# Altium PCB LED.PcbDoc
Units mm, origin at the board's own origin, x right, y up, seen from the top; angles counter-clockwise.
Board outline 66.17 x 37.72 mm, 2 copper layers (Top Layer, Bottom Layer); 48 components, 28 nets, 192 pads, 77 vias.
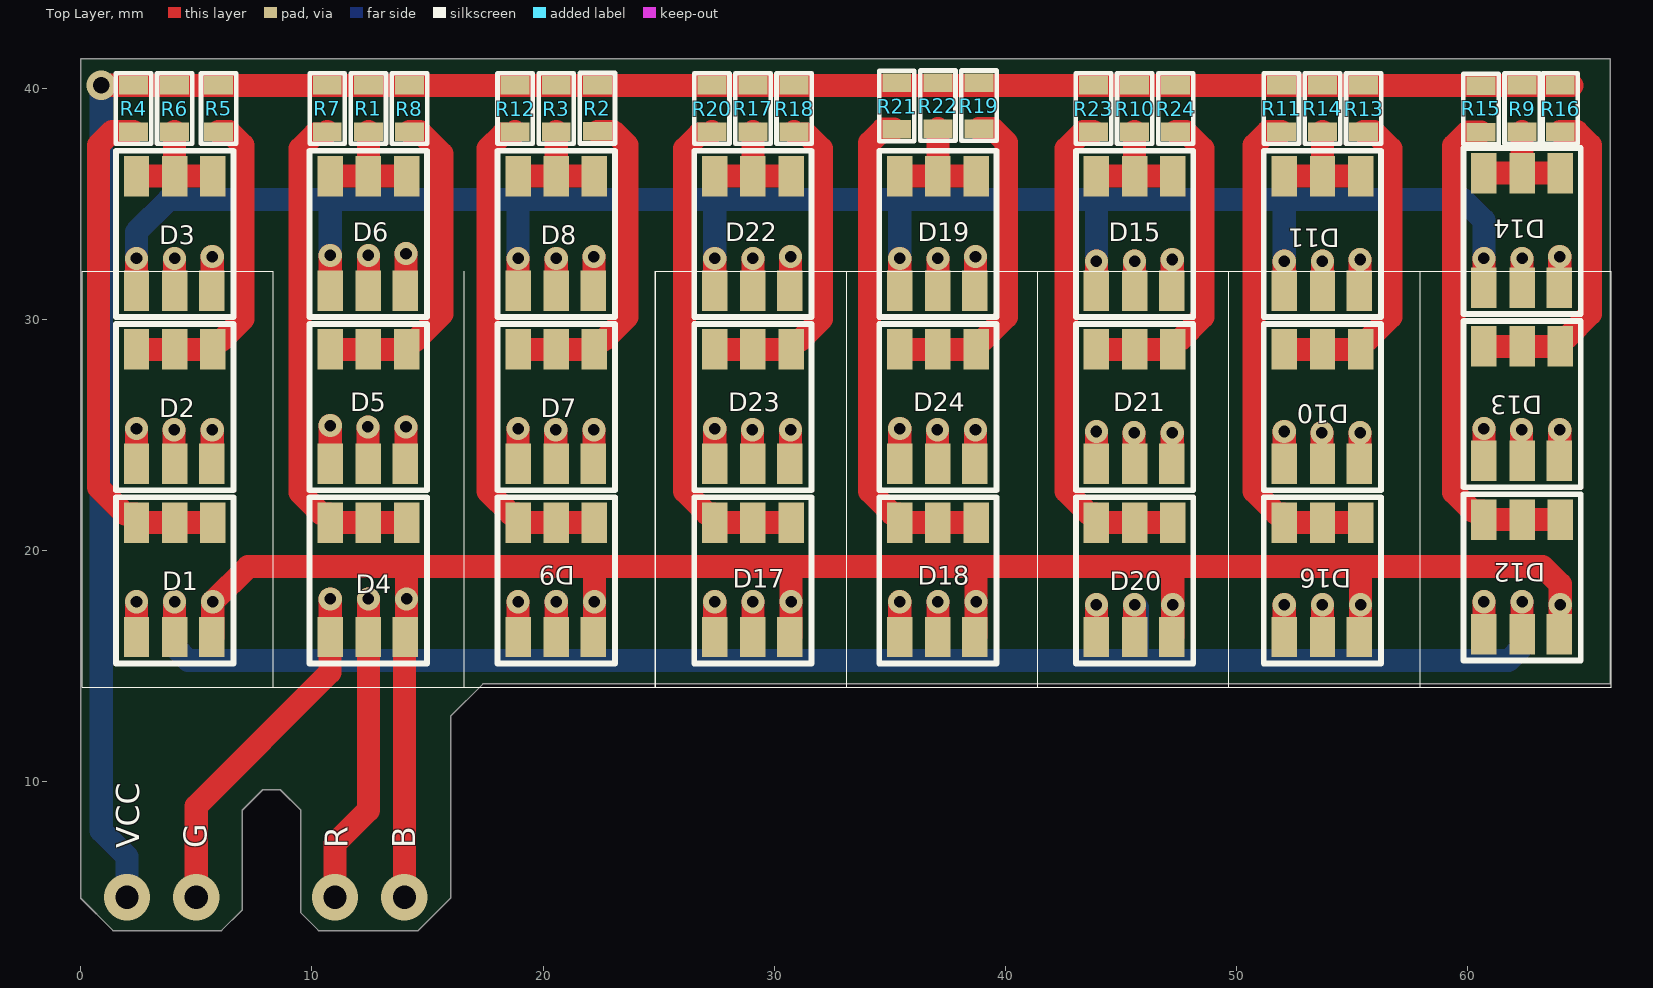
[diagram p0: Top Layer view]
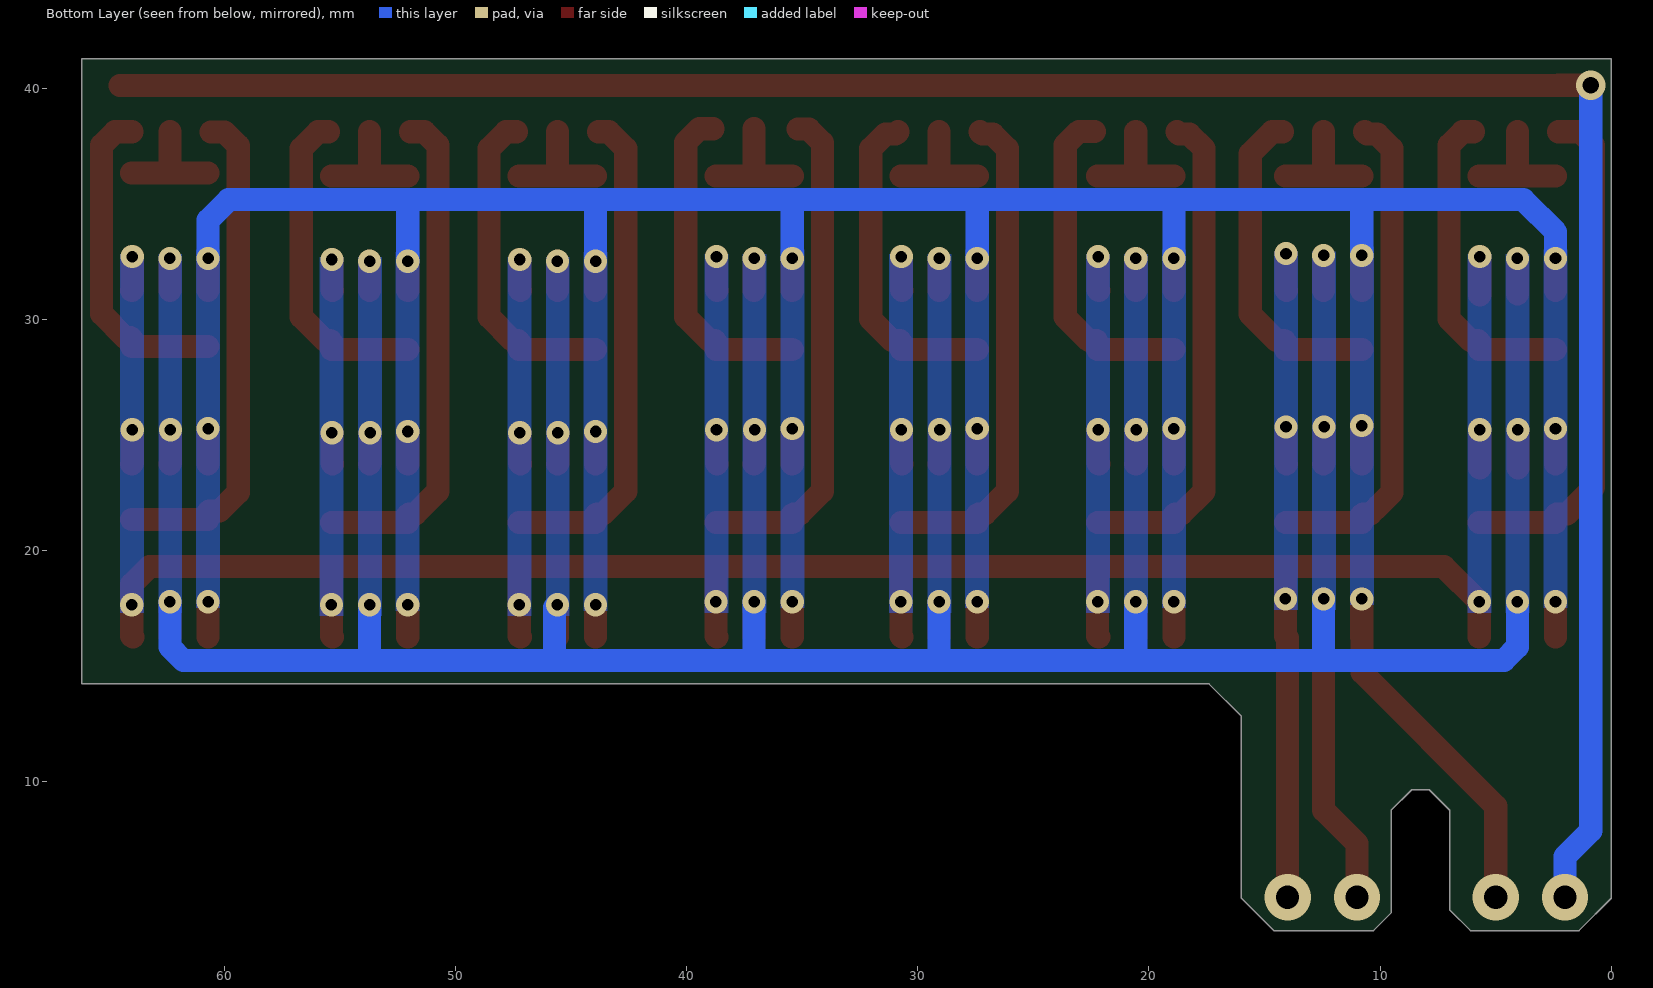
[diagram p1: Bottom Layer view, seen from below]
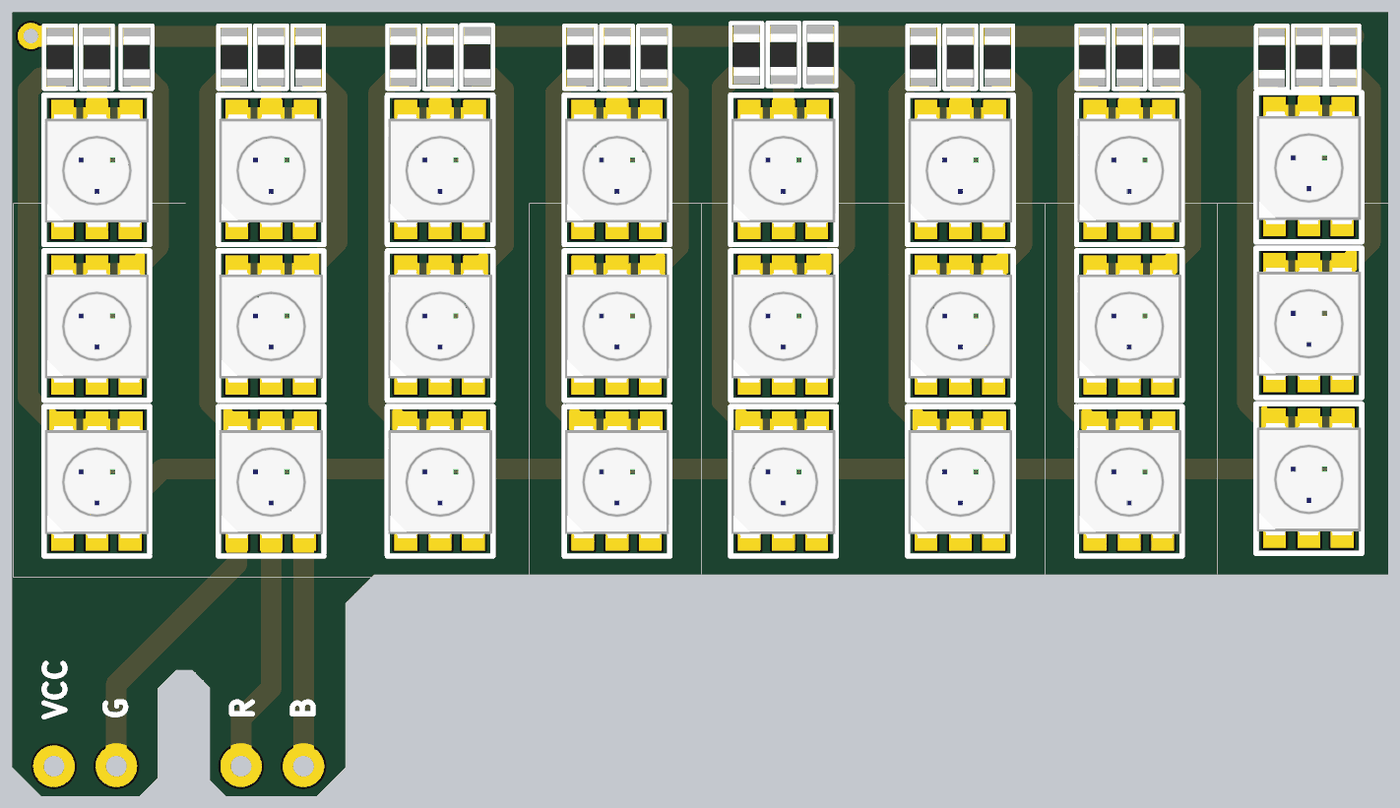
[diagram p2: 3D render of the assembled board from above, using the file's embedded part models]

## Layer stack, top to bottom
Top Solder: solder mask 0.0102, Solder Resist, Dk 3.5
Top Layer: signal copper 0.035
Dielectric 1: dielectric 0.32, FR-4, Dk 4.8
Bottom Layer: signal copper 0.035
Bottom Solder: solder mask 0.0102, Solder Resist, Dk 3.5

## Board outline
1.397,3.556 6.096,3.556 6.985,4.445 6.985,8.763 7.874,9.652 8.636,9.652 9.525,8.763 9.525,4.318 10.287,3.556 14.605,3.556 16.002,4.953 16.002,12.827 17.399,14.224 66.167,14.224 66.167,41.275 0,41.275 0,4.953

## Design rules (kind name [scope] priority, off if disabled: settings)
Clearance [All] p1: gap=0.254 ignorepadtopadclearanceinfootprint=FALSE
PolygonConnect [All] p1: connectstyle=Relief reliefconductorwidth=0.254 reliefentries=4 polygonreliefangle="90 Angle" airgapwidth=0.254
RoutingVias [All] p1: holewidth=0.711 width=1.27 viastyle="Through Hole" minholewidth=0.711 minwidth=1.27 maxholewidth=0.711 maxwidth=1.27
SolderMaskExpansion [All] p1: expansion=0.102 istentingtop=FALSE
Width [All] p1: maxlimit=5 minlimit=0.254 preferedwidth=0.254
30 further rules are at their usual default settings.

## Components (designator, comment, footprint, x,y, rotation, side; value= is the part's Value field where it differs from the comment)
D1 "LED_RGB" RGB_LED_5x5 4.064,18.669 r270 top
D2 "LED_RGB" RGB_LED_5x5 4.064,26.162 r270 top
D3 "LED_RGB" RGB_LED_5x5 4.064,33.655 r270 top
D4 "LED_RGB" RGB_LED_5x5 12.446,18.669 r270 top
D5 "LED_RGB" RGB_LED_5x5 12.446,26.162 r270 top
D6 "LED_RGB" RGB_LED_5x5 12.446,33.655 r270 top
D7 "LED_RGB" RGB_LED_5x5 20.574,26.162 r270 top
D8 "LED_RGB" RGB_LED_5x5 20.574,33.655 r270 top
D9 "LED_RGB" RGB_LED_5x5 20.574,18.669 r270 top
D10 "LED_RGB" RGB_LED_5x5 53.721,26.162 r270 top
D11 "LED_RGB" RGB_LED_5x5 53.721,33.655 r270 top
D12 "LED_RGB" RGB_LED_5x5 62.357,18.796 r270 top
D13 "LED_RGB" RGB_LED_5x5 62.357,26.289 r270 top
D14 "LED_RGB" RGB_LED_5x5 62.357,33.782 r270 top
D15 "LED_RGB" RGB_LED_5x5 45.593,33.655 r270 top
D16 "LED_RGB" RGB_LED_5x5 53.721,18.669 r270 top
D17 "LED_RGB" RGB_LED_5x5 29.083,18.669 r270 top
D18 "LED_RGB" RGB_LED_5x5 37.084,18.669 r270 top
D19 "LED_RGB" RGB_LED_5x5 37.084,33.655 r270 top
D20 "LED_RGB" RGB_LED_5x5 45.593,18.669 r270 top
D21 "LED_RGB" RGB_LED_5x5 45.593,26.162 r270 top
D22 "LED_RGB" RGB_LED_5x5 29.083,33.655 r270 top
D23 "LED_RGB" RGB_LED_5x5 29.083,26.162 r270 top
D24 "LED_RGB" RGB_LED_5x5 37.084,26.162 r270 top
R1 "220" RES-0805 12.446,39.116 r90 top
R2 "220" RES-0805 22.352,39.132 r90 top
R3 "220" RES-0805 20.574,39.116 r90 top
R4 "220" RES-0805 2.286,39.116 r90 top
R5 "220" RES-0805 5.969,39.116 r90 top
R6 "220" RES-0805 4.064,39.116 r90 top
R7 "220" RES-0805 10.668,39.116 r90 top
R8 "220" RES-0805 14.224,39.116 r90 top
R9 "220" RES-0805 62.357,39.116 r90 top
R10 "220" RES-0805 45.593,39.116 r90 top
R11 "220" RES-0805 51.943,39.116 r90 top
R12 "220" RES-0805 18.796,39.116 r90 top
R13 "220" RES-0805 55.499,39.116 r90 top
R14 "220" RES-0805 53.721,39.116 r90 top
R15 "220" RES-0805 60.579,39.1 r90 top
R16 "220" RES-0805 64.008,39.116 r90 top
R17 "220" RES-0805 29.083,39.116 r90 top
R18 "220" RES-0805 30.861,39.116 r90 top
R19 "220" RES-0805 38.862,39.243 r90 top
R20 "220" RES-0805 27.305,39.116 r90 top
R21 "220" RES-0805 35.306,39.227 r90 top
R22 "220" RES-0805 37.084,39.243 r90 top
R23 "220" RES-0805 43.815,39.116 r90 top
R24 "220" RES-0805 47.371,39.116 r90 top

## Footprints (in the part's own frame and the unit in brackets; to place one, negate y for a bottom-side part, rotate by r counter-clockwise, add the part's x,y. Pads: shape width x height; smd on the part's side, far side on the other; paste and mask are expansions set on the pad)
RES-0805 [mm]
  rect 0.8x1.25 smd mask+0.015: 1(-1,0) 2(1,0)
  silkscreen extent -1.52,-0.76 1.52,0.76, body extent -1,-0.62 1,0.63, height 0.6
RGB_LED_5x5 [mm]
  rect 1.75x1.1 / inner rect 1.524x1.524 / far side rect 0x0 all layers, no hole: 1(-2.54,1.651) 2(2.413,1.6) 3(-2.54,0) 4(2.413,0) 5(-2.54,-1.651) 6(2.413,-1.651)
  silkscreen extent -3.64,-2.54 3.56,2.54, body extent -2.7,-2.5 2.7,2.5, height 2

## Part data
R1 R2 R3 R4 R5 R6 R7 R8 R9 R10 R11 R12 R13 R14 R15 R16 R17 R18 R19 R20 R21 R22 R23 R24: library part RES-CONST

## Via types
v1: diameter 1, hole 0.5, Top Layer to Bottom Layer, 72 vias
v2: diameter 2, hole 1, Top Layer to Bottom Layer, 4 vias
v3: diameter 1.27, hole 0.711, Top Layer to Bottom Layer, 1 vias

## Nets (pads, with @x,y where several pads share a name; then routed paths per layer and width w, separated by ;. In a path a pad name is that pad's centre, name@x,y a point inside that pad or via, vN(x,y) a via of type N, cw(c..) or ccw(c..) an arc to the next point about the centre after c; other vN are vias at no path point)
NetD1_1: D1.1 D1.3 D1.5 R4.1 | length 22.3
  Top Layer w1: R4.1 1.348,38.116 0.762,37.53 0.762,22.733 1.911,21.584 2.363,21.584 2.413,21.534 D1.5 D1.3 D1.1
NetD1_2: D1.2 D2.2 D3.2 D4.2 D5.2 D6.2 D7.2 D8.2 D9.2 D10.2 D11.2 D12.2 D13.2 D14.2 D15.2 D16.2 D17.2 D18.2 D19.2 D20.2 D21.2 D22.2 D23.2 D24.2 | length 116.9
  Top Layer w1: D2.2@5.691,23.571 v1(5.691,25.222) ; D3.2@5.691,31.064 v1(5.691,32.715) ; D1.2@5.714,16.256 v1(5.715,17.78) v1(5.715,17.78) 7.239,19.304 14.097,19.304 ; v2@14.008,4.953 14.008,16.218 D4.2 14.096,16.306 v1(14.097,17.907) v1(14.097,17.907) 14.097,19.304 ; D5.2 14.073,23.776 v1(14.073,25.349) ; D6.2 14.073,31.269 v1(14.073,32.842) ; D9.2 22.224,16.306 v1(22.225,17.78) v1(22.225,17.78) 22.225,19.177 22.098,19.304 ; D7.2 22.201,23.776 v1(22.201,25.222) ; D8.2 22.201,31.269 v1(22.201,32.715) ; D17.2 30.733,16.306 v1(30.734,17.78) v1(30.734,17.78) 30.734,19.177 30.861,19.304 ; D23.2 30.71,23.776 v1(30.71,25.222) ; D22.2 30.71,31.269 v1(30.71,32.715) ; D18.2 38.734,16.306 v1(38.735,17.78) v1(38.735,17.78) 38.735,19.177 38.862,19.304 ; D24.2 38.711,23.776 v1(38.711,25.222) ; D19.2 38.711,31.269 v1(38.711,32.715) ; D20.2 47.243,16.306 v1(47.244,17.653) v1(47.244,17.653) 47.244,19.177 47.371,19.304 ; D21.2 47.22,23.776 v1(47.22,25.095) ; D15.2 47.22,31.269 v1(47.22,32.588) ; D16.2 55.371,16.306 v1(55.372,17.653) v1(55.372,17.653) 55.372,19.241 55.308,19.304 ; D10.2 55.348,23.776 v1(55.348,25.095) ; D11.2 55.348,31.269 v1(55.348,32.588) ; D12.2@63.957,16.256 64.007,16.306 v1(64.008,17.653) v1(64.008,17.653) 64.008,18.542 63.246,19.304 55.308,19.304 ; v1(63.984,25.222) 63.984,23.773 D13.2@64.008,23.749 ; v1(63.984,32.715) 63.984,31.266 D14.2@64.008,31.242 ; 14.097,19.304 22.098,19.304 ; 22.098,19.304 30.861,19.304 ; 30.861,19.304 38.862,19.304 ; 38.862,19.304 47.371,19.304 ; 47.371,19.304 55.308,19.304
  other v2: 14,5
NetD1_4: D1.4 D2.4 D3.4 D4.4 D5.4 D6.4 D7.4 D8.4 D9.4 D10.4 D11.4 D12.4 D13.4 D14.4 D15.4 D16.4 D17.4 D18.4 D19.4 D20.4 D21.4 D22.4 D23.4 D24.4 | length 125
  Top Layer w1: D2.4@4.04,23.571 v1(4.04,25.222) ; D1.4 v1(4.064,17.78) ; D3.4@4.064,31.088 D3.4 v1(4.064,32.639) ; v2(11,5) 11,7.317 12.446,8.763 D4.4 v1(12.446,17.907) ; v1(12.422,25.349) 12.422,23.773 D5.4 ; D6.4 v1(12.446,32.766) ; v1(20.55,25.222) 20.55,23.773 D7.4 ; D9.4 v1(20.574,17.78) ; D8.4 v1(20.574,32.639) ; v1(29.059,25.222) 29.059,23.773 D23.4 ; D17.4 v1(29.083,17.78) ; D22.4 v1(29.083,32.639) ; v1(37.06,25.222) 37.06,23.773 D24.4 ; D18.4 v1(37.084,17.78) ; D19.4 v1(37.084,32.639) ; v1(45.569,25.095) 45.569,23.773 D21.4 ; D20.4 v1(45.593,17.653) ; D15.4 v1(45.593,32.512) ; v1(53.697,25.095) 53.697,23.773 D10.4 ; D16.4 v1(53.721,17.653) ; D11.4 v1(53.721,32.512) ; v1(62.333,25.222) 62.333,23.773 D13.4@62.357,23.749 ; D12.4@62.357,16.256 D12.4 v1(62.357,17.78) ; D14.4@62.357,31.242 D14.4 v1(62.357,32.639)
  Bottom Layer w1: v1(4.064,17.78) 4.064,15.826 4.65,15.24 12.446,15.24 ; v1(12.446,17.907) 12.446,15.24 ; v1(20.574,17.78) 20.574,15.494 20.32,15.24 ; v1(29.083,17.78) 29.083,15.24 ; v1(37.084,17.78) 37.084,15.367 36.957,15.24 ; v1(45.593,17.653) 45.72,17.526 45.72,15.24 ; v1(53.721,17.653) 53.721,15.24 ; v1(62.357,17.78) 62.357,15.826 61.771,15.24 53.721,15.24 ; 12.446,15.24 20.32,15.24 ; 20.32,15.24 29.083,15.24 ; 29.083,15.24 36.957,15.24 ; 36.957,15.24 45.72,15.24 ; 45.72,15.24 53.721,15.24
NetD1_6: D1.6 D2.6 D3.6 D4.6 D5.6 D6.6 D7.6 D8.6 D9.6 D10.6 D11.6 D12.6 D13.6 D14.6 D15.6 D16.6 D17.6 D18.6 D19.6 D20.6 D21.6 D22.6 D23.6 D24.6 | length 126.4
  Top Layer w1: D1.6 v1(2.413,17.78) ; D2.6 v1(2.413,25.273) ; D3.6 v1(2.413,32.639) ; v2(5,5) 5,8.937 10.784,14.721 10.784,16.245 D4.6 v1(10.795,17.907) ; D5.6 v1(10.795,25.4) ; D6.6 v1(10.795,32.766) ; D9.6 v1(18.923,17.78) ; D7.6 v1(18.923,25.273) ; D8.6 v1(18.923,32.639) ; D17.6 v1(27.432,17.78) ; D23.6 v1(27.432,25.273) ; D22.6 v1(27.432,32.639) ; D18.6 v1(35.433,17.78) ; D24.6 v1(35.433,25.273) ; D19.6 v1(35.433,32.639) ; D20.6 v1(43.942,17.653) ; D21.6 v1(43.942,25.146) ; D15.6 v1(43.942,32.512) ; D16.6 v1(52.07,17.653) ; D10.6 v1(52.07,25.146) ; D11.6 v1(52.07,32.512) ; D12.6@60.706,16.256 D12.6 v1(60.706,17.78) ; D13.6@60.706,23.749 D13.6 v1(60.706,25.273) ; D14.6@60.706,31.242 D14.6 v1(60.706,32.639)
  Bottom Layer w1: v1(2.413,32.639) 2.413,33.782 3.81,35.179 10.795,35.179 ; v1(10.795,32.766) 10.795,35.179 ; v1(18.923,32.639) 18.923,35.052 19.05,35.179 ; v1(27.432,32.639) 27.432,35.052 27.305,35.179 ; v1(35.433,32.639) 35.433,35.052 35.56,35.179 ; v1(43.942,32.512) 43.942,35.179 ; v1(52.07,32.512) 52.07,35.052 51.943,35.179 ; v1(60.706,32.639) 60.706,34.29 59.817,35.179 51.943,35.179 ; 10.795,35.179 19.05,35.179 ; 19.05,35.179 27.305,35.179 ; 27.305,35.179 35.56,35.179 ; 35.56,35.179 43.942,35.179 ; 43.942,35.179 51.943,35.179
NetD2_1: D2.1 D2.3 D2.5 R5.1 | length 14.2
  Top Layer w1: D2.5 D2.3 D2.1 5.715,29.027 5.765,29.077 6.09,29.077 7.019,30.006 7.019,37.53 6.433,38.116 R5.1
NetD3_1: D3.1 D3.3 D3.5 R6.1 | length 5.2
  Top Layer w1: D3.5 D3.3 ; R6.1 D3.3 ; D3.1 D3.3
NetD4_1: D4.1 D4.3 D4.5 R7.1 | length 21.7
  Top Layer w1: R7.1 10.568,38.016 10.125,38.016 9.491,37.382 9.491,22.507 10.077,21.922 10.082,21.922 10.42,21.584 10.745,21.584 10.795,21.534 D4.5 D4.3 D4.1
NetD5_1: D5.1 D5.3 D5.5 R8.1 | length 14.4
  Top Layer w1: D5.5 D5.3 D5.1 14.097,29.027 14.147,29.077 14.472,29.077 15.621,30.226 15.621,37.162 14.667,38.116 R8.1
NetD6_1: D6.1 D6.3 D6.5 R1.1 | length 5.2
  Top Layer w1: D6.5 D6.3 ; R1.1 D6.3 ; D6.1 D6.3
NetD7_1: D7.1 D7.3 D7.5 R2.1 | length 14
  Top Layer w1: D7.5 D7.3 D7.1 ; D7.1@22.275,29.077 22.6,29.077 23.622,30.099 23.622,37.546 23.036,38.132 R2.1
NetD8_1: D8.1 D8.3 D8.5 R3.1 | length 5.2
  Top Layer w1: D8.5 D8.3 ; R3.1 D8.3 ; D8.1 D8.3
NetD9_1: D9.1 D9.3 D9.5 R12.1 | length 21.7
  Top Layer w1: R12.1 18.696,38.016 18.253,38.016 17.619,37.382 17.619,22.562 18.597,21.584 18.873,21.584 18.923,21.534 D9.5 D9.3 D9.1
NetD10_1: D10.1 D10.3 D10.5 R13.1 | length 14.1
  Top Layer w1: D10.5 D10.3 D10.1 55.372,29.027 55.422,29.077 55.647,29.077 56.676,30.106 56.676,37.382 55.942,38.116 R13.1
NetD11_1: D11.1 D11.3 D11.5 R14.1 | length 5.2
  Top Layer w1: D11.5 D11.3 ; R14.1 D11.3 ; D11.1 D11.3
NetD12_1: D12.1 D12.3 D12.5 R15.1 | length 21.7
  Top Layer w1: R15.1 59.993,38.1 59.402,37.509 59.402,22.513 60.204,21.711 60.656,21.711 60.706,21.661 D12.5 D12.3 D12.1
NetD13_1: D13.1 D13.3 D13.5 R16.1 | length 14.2
  Top Layer w1: D13.5 D13.3 D13.1 64.008,29.154 64.058,29.204 64.283,29.204 65.312,30.233 65.312,37.53 64.726,38.116 R16.1
NetD14_1: D14.1 D14.3 D14.5 R9.1 | length 5.1
  Top Layer w1: D14.5 D14.3 ; R9.1 D14.3 ; D14.1 D14.3
NetD15_1: D15.1 D15.3 D15.5 R10.1 | length 5.2
  Top Layer w1: D15.5 D15.3 ; R10.1 D15.3 ; D15.1 D15.3
NetD16_1: D16.1 D16.3 D16.5 R11.1 | length 21.7
  Top Layer w1: R11.1 51.352,38.116 50.766,37.53 50.766,22.562 51.744,21.584 52.02,21.584 52.07,21.534 D16.5 D16.3 D16.1
NetD17_1: D17.1 D17.3 D17.5 R20.1 | length 21.7
  Top Layer w1: R20.1 27.205,38.016 26.762,38.016 26.128,37.382 26.128,22.562 27.106,21.584 27.382,21.584 27.432,21.534 D17.5 D17.3 D17.1
NetD18_1: D18.1 D18.3 D18.5 R21.1 | length 21.7
  Top Layer w1: R21.1@35.181,38.227 34.715,38.227 34.129,37.641 34.129,22.562 35.107,21.584 35.383,21.584 35.433,21.534 D18.5 D18.3 D18.1
NetD19_1: D19.1 D19.3 D19.5 R22.1 | length 5.4
  Top Layer w1: D19.5 D19.3 ; R22.1 D19.3 ; D19.1 D19.3
NetD20_1: D20.1 D20.3 D20.5 R23.1 | length 21.7
  Top Layer w1: R23.1 43.372,38.116 42.638,37.382 42.638,22.562 43.616,21.584 43.892,21.584 43.942,21.534 D20.5 D20.3 D20.1
NetD21_1: D21.1 D21.3 D21.5 R24.1 | length 14.1
  Top Layer w1: D21.5 D21.3 D21.1 47.244,29.027 47.294,29.077 47.519,29.077 48.548,30.106 48.548,37.382 47.814,38.116 R24.1
NetD22_1: D22.1 D22.3 D22.5 R17.1 | length 5.2
  Top Layer w1: D22.5 D22.3 ; R17.1 D22.3 ; D22.1 D22.3
NetD23_1: D23.1 D23.3 D23.5 R18.1 | length 14.2
  Top Layer w1: D23.5 D23.3 D23.1 30.734,29.027 30.784,29.077 31.109,29.077 32.038,30.006 32.038,37.382 31.404,38.016 30.961,38.016 R18.1
NetD24_1: D24.1 D24.3 D24.5 R19.1 | length 14.3
  Top Layer w1: D24.5 D24.3 D24.1 38.735,29.027 38.785,29.077 39.01,29.077 40.039,30.106 40.039,37.657 39.453,38.243 R19.1
VCC: R1.2 R2.2 R3.2 R4.2 R5.2 R6.2 R7.2 R8.2 R9.2 R10.2 R11.2 R12.2 R13.2 R14.2 R15.2 R16.2 R17.2 R18.2 R19.2 R20.2 R21.2 R22.2 R23.2 R24.2 | length 99.2
  Top Layer w1: v3(0.889,40.132) 0.897,40.124 2.278,40.124 R4.2 R6.2 R5.2 R7.2 R1.2 R8.2 R12.2 R3.2 R20.2 R17.2 R18.2 R23.2 R10.2 R24.2 R11.2 R14.2 R13.2 R9.2 R16.2 R16.2@64.516,40.116
  Bottom Layer w1: v3(0.889,40.132) 0.889,7.874 2,6.763 v2(2,5)

## Polygon pours and split planes (outlines as drawn)
NetD1_4 on Bottom Layer "NONET_L-01_P-001" (solid, pour order 1): 3.541,32.807 3.541,17.313 4.557,17.313 4.557,32.807
NetD1_4 on Bottom Layer "NONET_L-01_P-001" (solid, pour order 19): 53.198,32.68 53.198,17.186 54.214,17.186 54.214,32.68
NetD1_4 on Bottom Layer "NONET_L-01_P-001" (solid, pour order 22): 61.834,32.807 61.834,17.313 62.85,17.313 62.85,32.807
NetD1_6 on Bottom Layer "NONET_L-01_P-001" (solid, pour order 21): 60.198,33.02 60.198,17.526 61.214,17.526 61.214,33.02
NetD1_2 on Bottom Layer "NONET_L-01_P-001" (solid, pour order 23): 63.485,32.807 63.485,17.313 64.501,17.313 64.501,32.807
NetD1_2 on Bottom Layer "NONET_L-01_P-001" (solid, pour order 20): 54.849,32.68 54.849,17.186 55.865,17.186 55.865,32.68
NetD1_6 on Bottom Layer "NONET_L-01_P-001" (solid, pour order 18): 51.562,32.893 51.562,17.399 52.578,17.399 52.578,32.893
NetD1_2 on Bottom Layer "NONET_L-01_P-001" (solid, pour order 17): 46.721,32.68 46.721,17.186 47.737,17.186 47.737,32.68
NetD1_4 on Bottom Layer "NONET_L-01_P-001" (solid, pour order 16): 45.07,32.68 45.07,17.186 46.086,17.186 46.086,32.68
NetD1_6 on Bottom Layer "NONET_L-01_P-001" (solid, pour order 15): 43.434,32.893 43.434,17.399 44.45,17.399 44.45,32.893
NetD1_2 on Bottom Layer "NONET_L-01_P-001" (solid, pour order 14): 38.212,32.807 38.212,17.313 39.228,17.313 39.228,32.807
NetD1_4 on Bottom Layer "NONET_L-01_P-001" (solid, pour order 13): 36.561,32.807 36.561,17.313 37.577,17.313 37.577,32.807
NetD1_6 on Bottom Layer "NONET_L-01_P-001" (solid, pour order 12): 34.925,33.02 34.925,17.526 35.941,17.526 35.941,33.02
NetD1_2 on Bottom Layer "NONET_L-01_P-001" (solid, pour order 11): 30.211,32.807 30.211,17.313 31.227,17.313 31.227,32.807
NetD1_4 on Bottom Layer "NONET_L-01_P-001" (solid, pour order 10): 28.56,32.807 28.56,17.313 29.576,17.313 29.576,32.807
NetD1_6 on Bottom Layer "NONET_L-01_P-001" (solid, pour order 9): 26.924,33.02 26.924,17.526 27.94,17.526 27.94,33.02
NetD1_2 on Bottom Layer "NONET_L-01_P-001" (solid, pour order 8): 21.702,32.807 21.702,17.313 22.718,17.313 22.718,32.807
NetD1_4 on Bottom Layer "NONET_L-01_P-001" (solid, pour order 7): 20.051,32.807 20.051,17.313 21.067,17.313 21.067,32.807
NetD1_6 on Bottom Layer "NONET_L-01_P-001" (solid, pour order 6): 18.415,33.02 18.415,17.526 19.431,17.526 19.431,33.02
NetD1_2 on Bottom Layer "NONET_L-01_P-001" (solid, pour order 5): 13.574,32.934 13.574,17.44 14.59,17.44 14.59,32.934
NetD1_4 on Bottom Layer "NONET_L-01_P-001" (solid, pour order 4): 11.923,32.934 11.923,17.44 12.939,17.44 12.939,32.934
NetD1_6 on Bottom Layer "NONET_L-01_P-001" (solid, pour order 3): 10.287,33.147 10.287,17.653 11.303,17.653 11.303,33.147
NetD1_2 on Bottom Layer "NONET_L-01_P-001" (solid, pour order 2): 5.192,32.807 5.192,17.313 6.208,17.313 6.208,32.807
NetD1_6 on Bottom Layer "NONET_L-01_P-001" (solid, pour order 0): 1.905,33.02 1.905,17.526 2.921,17.526 2.921,33.02

## Silkscreen, mask and mechanical layers (free items; w line width, h text height)
Top Overlay:
  lines w0.013: 0.056,14.077 0.056,32.077 ; 0.056,14.077 0.056,32.077 ; 0.056,14.077 8.326,14.077 8.326,32.077 0.056,32.077 ; 0.056,14.077 66.216,14.077 ; 8.327,14.077 8.327,32.077 ; 8.327,14.077 8.327,32.077 ; 8.327,14.077 16.596,14.077 ; 8.327,14.077 8.327,32.077 ; 16.596,14.077 16.596,32.077 ; 16.596,14.077 16.596,32.077 ; 16.596,14.077 16.597,14.077 ; 16.597,14.077 16.597,32.077 ; 16.597,14.077 24.866,14.077 ; 16.597,14.077 16.597,32.077 ; 16.596,32.077 16.597,32.077 ; 24.866,14.077 24.867,14.077 ; 24.867,14.077 24.867,32.077 ; 24.867,14.077 33.136,14.077 ; 24.866,14.077 24.866,32.077 ; 24.866,14.077 24.866,32.077 ; 24.867,14.077 24.867,32.077 ; 24.867,32.077 33.136,32.077 ; 24.866,32.077 24.867,32.077 ; 33.136,14.077 33.137,14.077 ; 33.136,14.077 33.136,32.077 ; 33.136,14.077 33.136,32.077 ; 33.136,32.077 33.137,32.077 ; 33.137,14.077 33.137,32.077 ; 33.137,14.077 41.406,14.077 ; 33.137,14.077 33.137,32.077 ; 33.137,32.077 41.406,32.077 ; 41.406,14.077 41.406,32.077 ; 41.406,14.077 41.406,32.077 ; 41.406,14.077 41.407,14.077 ; 41.406,32.077 41.407,32.077 ; 41.407,14.077 41.407,32.077 ; 41.407,14.077 41.407,32.077 ; 41.407,14.077 49.676,14.077 ; 41.407,32.077 49.676,32.077 ; 49.676,14.077 49.676,32.077 ; 49.676,14.077 49.676,32.077 ; 49.676,14.077 49.677,14.077 ; 49.676,32.077 49.677,32.077 ; 49.677,14.077 49.677,32.077 ; 49.677,14.077 49.677,32.077 ; 49.677,14.077 57.946,14.077 ; 49.677,32.077 57.946,32.077 ; 57.946,14.077 57.946,32.077 ; 57.946,14.077 57.946,32.077 ; 57.946,14.077 57.947,14.077 ; 57.946,32.077 57.947,32.077 ; 57.947,14.077 57.947,32.077 ; 57.947,14.077 66.216,14.077 ; 57.947,14.077 57.947,32.077 ; 57.947,32.077 66.216,32.077 ; 66.216,14.077 66.216,32.077 ; 66.216,14.077 66.216,32.077
  text "VCC" at 2.54,7.112 h1 r90
  text "G" at 5.461,7.112 h1 r90
  text "R" at 11.557,7.112 h1 r90
  text "B" at 14.478,7.112 h1 r90
Mechanical 1:
  lines w0.254: 0,4.953 0,13.97 0,41.275 66.167,41.275 66.167,14.224 17.399,14.224 16.002,12.827 16.002,4.953 14.605,3.556 10.287,3.556 9.525,4.318 9.525,8.763 8.636,9.652 7.874,9.652 6.985,8.763 6.985,4.445 6.096,3.556 1.397,3.556 0,4.953